# Altium PCB DBL TLC5940 driver for High load.PcbDoc
Units mm, origin at the board's own origin, x right, y up, seen from the top; angles counter-clockwise.
Board outline 152.4 x 101.6 mm, 2 copper layers (Top Layer, Bottom Layer); 66 components, 76 nets, 448 pads, 19 vias.
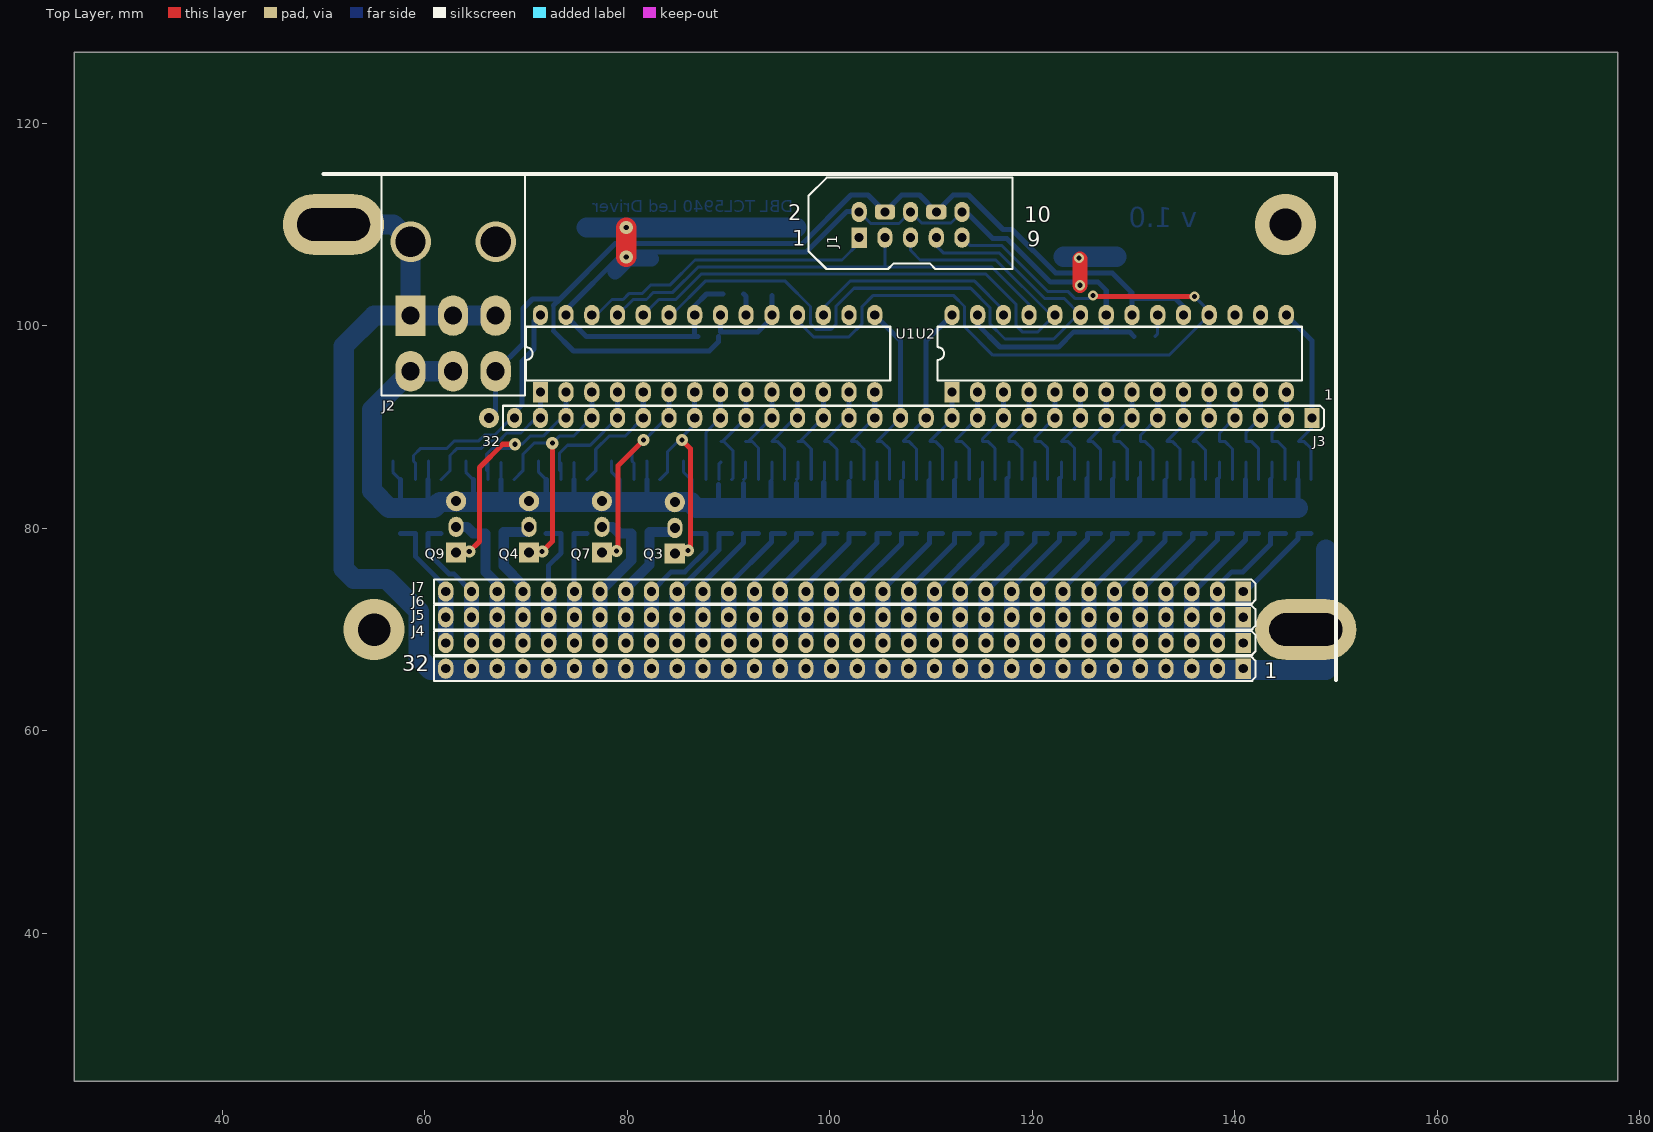
[diagram p0: Top Layer view]
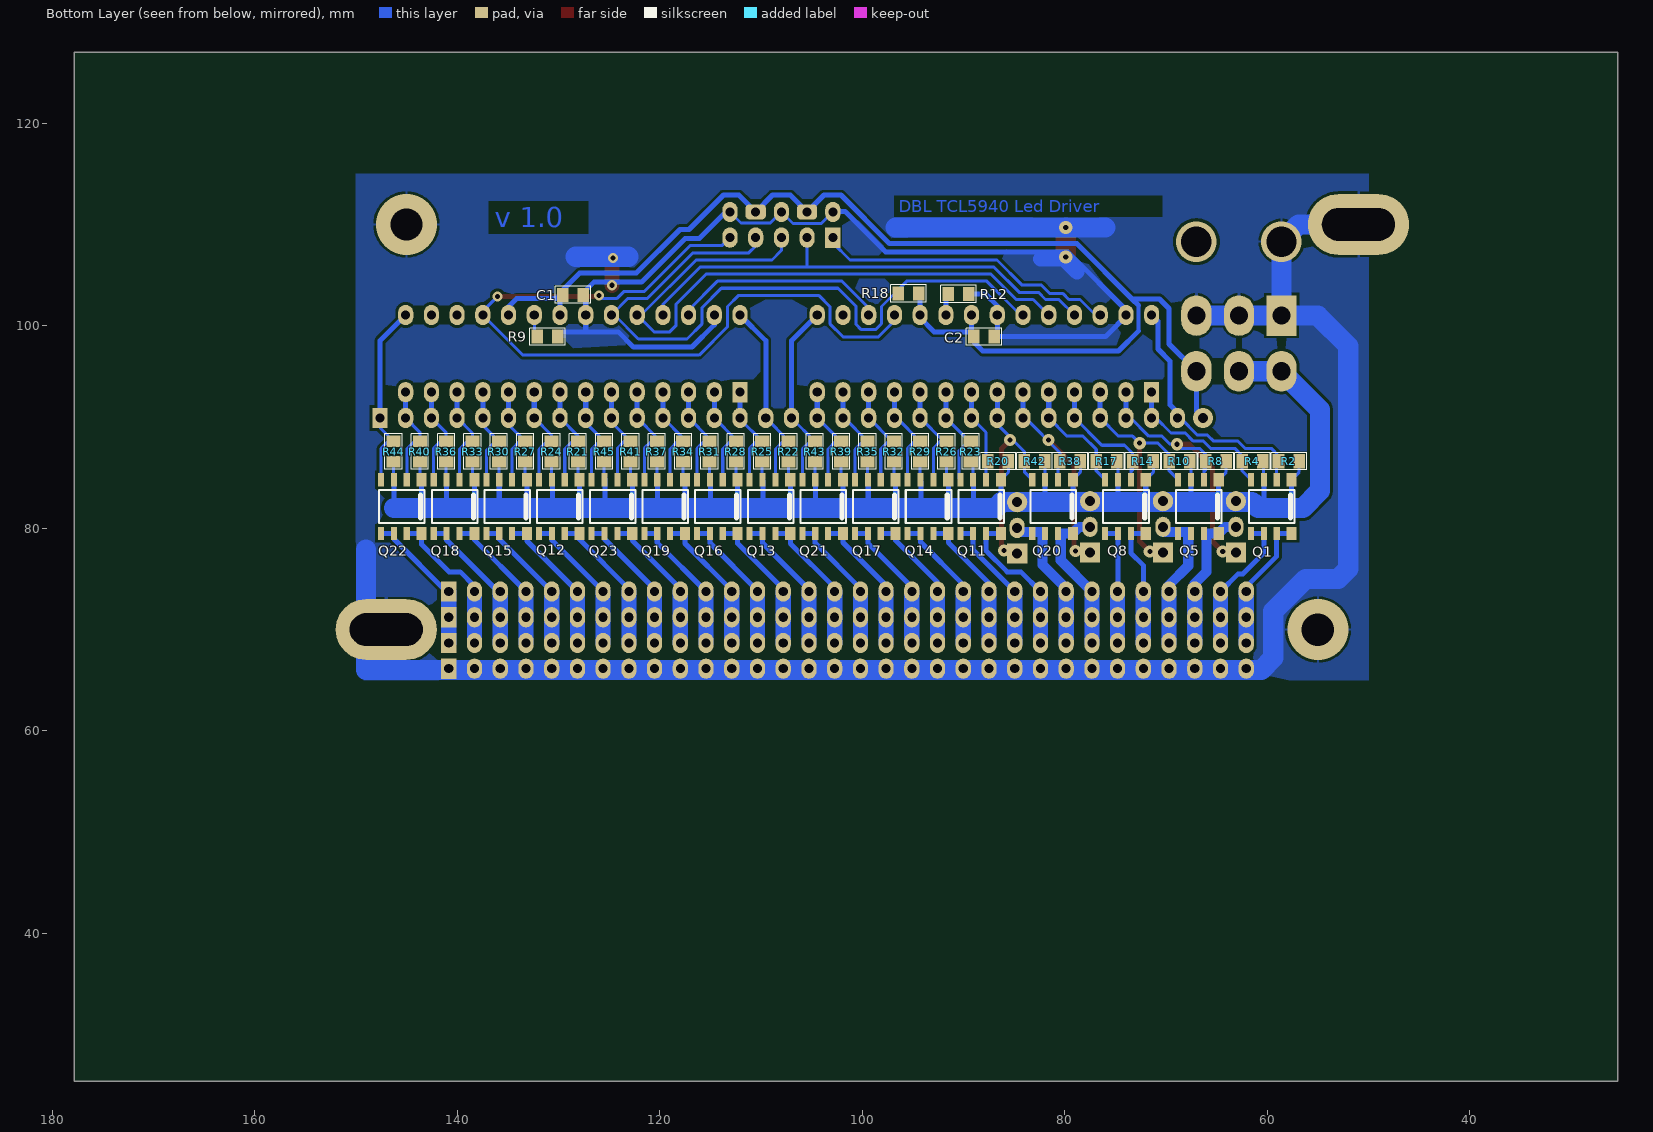
[diagram p1: Bottom Layer view, seen from below]
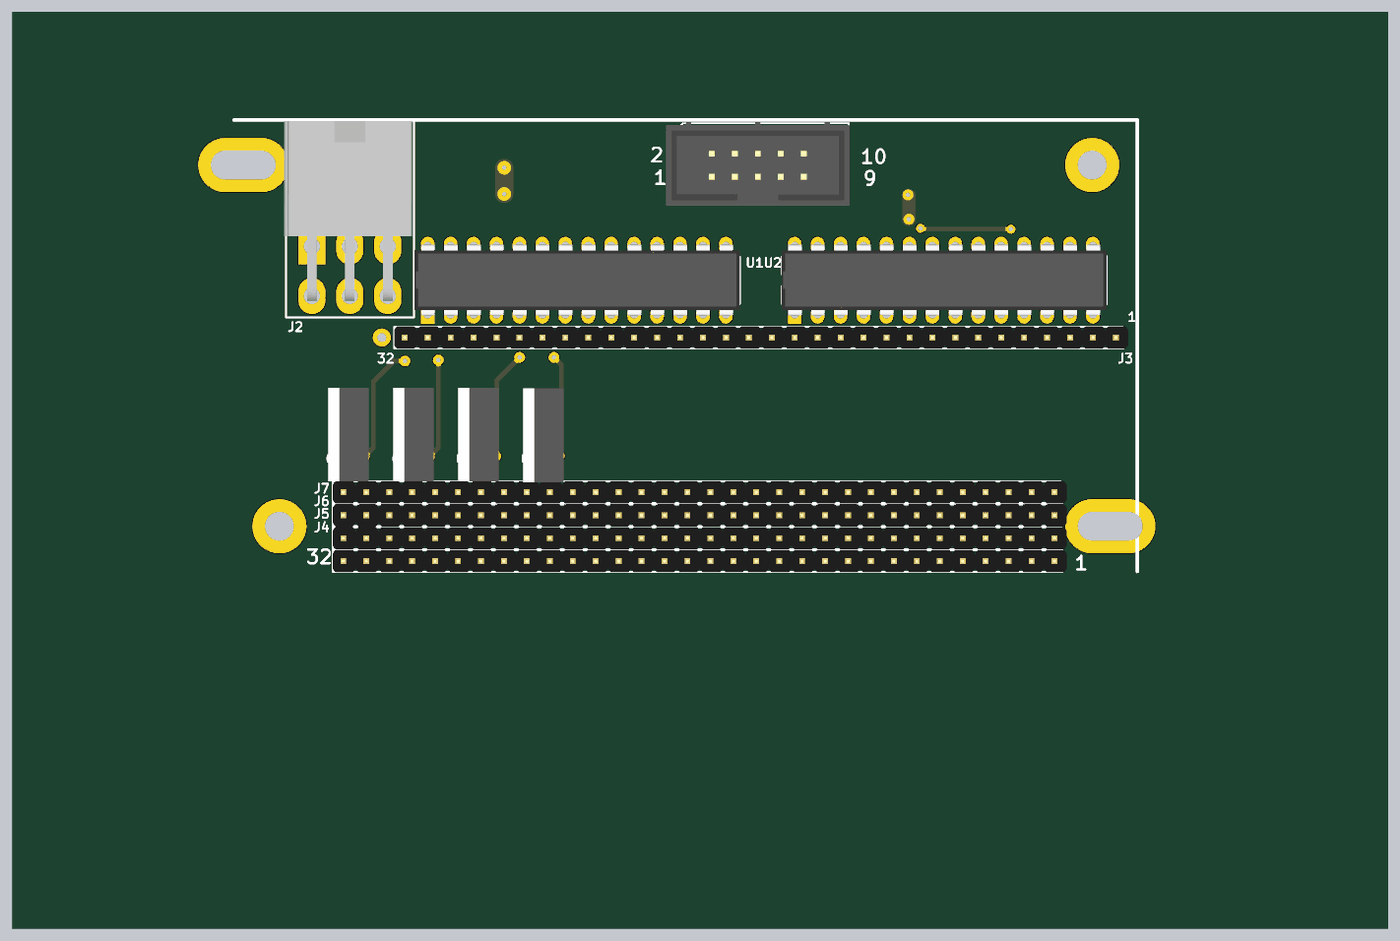
[diagram p2: 3D render of the assembled board from above, using the file's embedded part models]
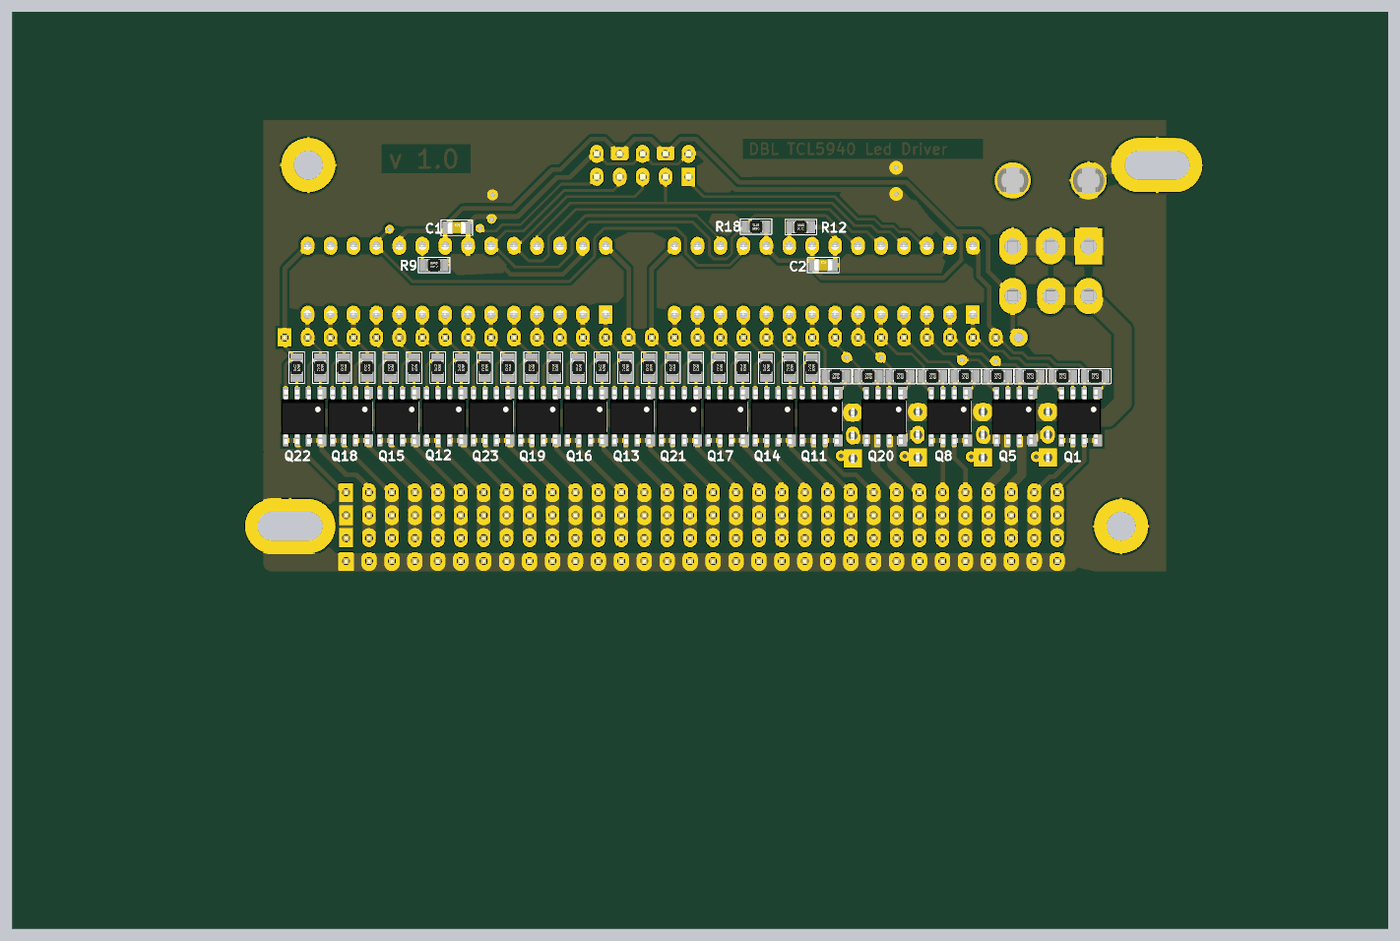
[diagram p3: 3D render of the assembled board from below, using the file's embedded part models]

## Layer stack, top to bottom
Top Solder: solder mask 0.0102, Solder Resist, Dk 3.5
Top Layer: signal copper 0.0356
Dielectric 1: dielectric 0.32, FR-4, Dk 4.8
Bottom Layer: signal copper 0.0356
Bottom Solder: solder mask 0.0102, Solder Resist, Dk 3.5

## Board outline
25.4,25.4 177.8,25.4 177.8,127 25.4,127

## Design rules (kind name [scope] priority, off if disabled: settings)
Clearance Clearance_1 [InComponent('J1')] p1: gap=0.2
Clearance [All] p2: gap=0.3
ComponentClearance ComponentClearance_1 [(HasFootprint('SMD 0603 (1608)')) vs (HasFootprint('SMD 0603 (1608)'))] p1: gap=0.01 collisioncheckmode=3 verticalgap=0.254 showdistances=FALSE
ComponentClearance [All] p2: gap=0.01 collisioncheckmode=3 verticalgap=0.001 showdistances=FALSE
PolygonConnect [All] p1: connectstyle=Relief reliefconductorwidth=0.254 reliefentries=4 polygonreliefangle="90 Angle" airgapwidth=0.254
RoutingVias [All] p1: holewidth=0.711 width=1.27 viastyle="Through Hole" minholewidth=0.711 minwidth=1.27 maxholewidth=0.711 maxwidth=1.27
SolderMaskExpansion [All] p1: expansion=0.102
Width Width_1 [InNet('GND')] p1: maxlimit=3 minlimit=0.2 preferedwidth=0.5
Width [All] p2: maxlimit=3 minlimit=0.3 preferedwidth=0.3
28 further rules are at their usual default settings.

## Classes and differential pairs
component class "DBL TLC5940 driver for High load": C1 C2 J1 J2 J3 J4 J5 J6 J7 Q3 Q4 Q7 Q9 R9 R12 R18 U1 U2
component class "DBL TLC5940 driver for High load - 5.3A MOSFET": Q1 Q5 Q8 Q11 Q12 Q13 Q14 Q15 Q16 Q17 Q18 Q19 Q20 Q21 Q22 Q23 R2 R4 R8 R10 R14 R17 R20 R21 R22 R23 R24 R25 R26 R27 R28 R29 R30 R31 R32 R33 R34 R35 R36 R37 R38 R39 R40 R41 R42 R43 R44 R45

## Components (designator, comment, footprint, x,y, rotation, side; value= is the part's Value field where it differs from the comment)
C1 "0.1uF" "SMD 0805 (2012)" 129.591,103.025 r180 bottom
C2 "0.1uF" "SMD 0805 (2012)" 89,98.9 r180 bottom
J1 "Connector" "LINE 2.54 x 10D (2 x 5) - BH" 102.9,108.7 r90 top
J2 "connector" "Molex Mini-Fit Jr - 6Pin R" 67,101 r270 top
J3 "Test Connector" "LINE 2.54 x 32" 147.62,90.9 r270 top
J4 "PowerOut" "LINE 2.54 x 32" 140.82,66.14 r270 top (schematic designator J2)
J5 "PowerOut" "LINE 2.54 x 32" 140.82,68.68 r270 top (schematic designator J2)
J6 "PowerOut" "LINE 2.54 x 32" 140.82,71.22 r270 top (schematic designator J2)
J7 "PowerOut" "LINE 2.54 x 32" 140.82,73.76 r270 top (schematic designator J2)
Q1 "IRF7314" SO8 57.8,84.8 r270 bottom
Q3 "IRF4905" TO220-2 84.7,77.5 r0 top
Q4 "IRF4905" TO220-2 70.3,77.6 r0 top
Q5 "IRF7314" SO8 65,84.8 r270 bottom
Q7 "IRF4905" TO220-2 77.5,77.6 r0 top
Q8 "IRF7314" SO8 72.2,84.8 r270 bottom
Q9 "IRF4905" TO220-2 63.1,77.6 r0 top
Q11 "IRF7314" SO8 86.5,84.8 r270 bottom
Q12 "IRF7314" SO8 128.1,84.8 r270 bottom
Q13 "IRF7314" SO8 107.3,84.8 r270 bottom
Q14 "IRF7314" SO8 91.7,84.8 r270 bottom
Q15 "IRF7314" SO8 133.3,84.8 r270 bottom
Q16 "IRF7314" SO8 112.5,84.8 r270 bottom
Q17 "IRF7314" SO8 96.9,84.8 r270 bottom
Q18 "IRF7314" SO8 138.5,84.8 r270 bottom
Q19 "IRF7314" SO8 117.7,84.8 r270 bottom
Q20 "IRF7314" SO8 79.4,84.8 r270 bottom
Q21 "IRF7314" SO8 102.1,84.8 r270 bottom
Q22 "IRF7314" SO8 143.7,84.8 r270 bottom
Q23 "IRF7314" SO8 122.9,84.8 r270 bottom
R2 "10 kOm" "SMD 0805 (2012)" 58.9,86.6 r180 bottom
R4 "10 kOm" "SMD 0805 (2012)" 62.5,86.6 r180 bottom
R8 "10 kOm" "SMD 0805 (2012)" 66.1,86.6 r180 bottom
R9 "560 kOm" "SMD 0805 (2012)" 132.1,98.9 r180 bottom
R10 "10 kOm" "SMD 0805 (2012)" 69.7,86.6 r180 bottom
R12 "560 kOm" "SMD 0805 (2012)" 91.5,103.1 r180 bottom
R14 "10 kOm" "SMD 0805 (2012)" 73.3,86.6 r180 bottom
R17 "10 kOm" "SMD 0805 (2012)" 76.9,86.6 r180 bottom
R18 "20kOm" "SMD 0805 (2012)" 94.4,103.2 r0 bottom
R20 "10 kOm" "SMD 0805 (2012)" 87.6,86.6 r180 bottom
R21 "10 kOm" "SMD 0805 (2012)" 128.1,88.6 r270 bottom
R22 "10 kOm" "SMD 0805 (2012)" 107.3,88.6 r270 bottom
R23 "10 kOm" "SMD 0805 (2012)" 89.3,88.6 r270 bottom
R24 "10 kOm" "SMD 0805 (2012)" 130.7,88.6 r270 bottom
R25 "10 kOm" "SMD 0805 (2012)" 109.9,88.6 r270 bottom
R26 "10 kOm" "SMD 0805 (2012)" 91.7,88.6 r270 bottom
R27 "10 kOm" "SMD 0805 (2012)" 133.3,88.6 r270 bottom
R28 "10 kOm" "SMD 0805 (2012)" 112.5,88.6 r270 bottom
R29 "10 kOm" "SMD 0805 (2012)" 94.3,88.6 r270 bottom
R30 "10 kOm" "SMD 0805 (2012)" 135.9,88.6 r270 bottom
R31 "10 kOm" "SMD 0805 (2012)" 115.1,88.6 r270 bottom
R32 "10 kOm" "SMD 0805 (2012)" 96.9,88.6 r270 bottom
R33 "10 kOm" "SMD 0805 (2012)" 138.5,88.6 r270 bottom
R34 "10 kOm" "SMD 0805 (2012)" 117.7,88.6 r270 bottom
R35 "10 kOm" "SMD 0805 (2012)" 99.5,88.6 r270 bottom
R36 "10 kOm" "SMD 0805 (2012)" 141.1,88.6 r270 bottom
R37 "10 kOm" "SMD 0805 (2012)" 120.3,88.6 r270 bottom
R38 "10 kOm" "SMD 0805 (2012)" 80.5,86.6 r180 bottom
R39 "10 kOm" "SMD 0805 (2012)" 102.1,88.6 r270 bottom
R40 "10 kOm" "SMD 0805 (2012)" 143.7,88.6 r270 bottom
R41 "10 kOm" "SMD 0805 (2012)" 122.9,88.6 r270 bottom
R42 "10 kOm" "SMD 0805 (2012)" 84,86.6 r180 bottom
R43 "10 kOm" "SMD 0805 (2012)" 104.7,88.6 r270 bottom
R44 "10 kOm" "SMD 0805 (2012)" 146.3,88.6 r270 bottom
R45 "10 kOm" "SMD 0805 (2012)" 125.5,88.6 r270 bottom
U1 "PWM Led Driver" "DIP-28 (OVAL)" 71.42,93.44 r0 top
U2 "PWM Led Driver" "DIP-28 (OVAL)" 112.06,93.44 r0 top

## Footprints (in the part's own frame and the unit in brackets; to place one, negate y for a bottom-side part, rotate by r counter-clockwise, add the part's x,y. Pads: shape width x height; smd on the part's side, far side on the other; paste and mask are expansions set on the pad)
"DIP-28 (OVAL)" [mm] "DIP; 28 Leads; Row Spacing 7.62 mm; Pitch 2.54 mm"
  rect 1.5x2 hole 0.9: 1(0,0)
  oval 1.5x2 hole 0.9: 2(2.54,0) 3(5.08,0) 4(7.62,0) 5(10.16,0) 6(12.7,0) 7(15.24,0) 8(17.78,0) 9(20.32,0) 10(22.86,0) 11(25.4,0) 12(27.94,0) 13(30.48,0) 14(33.02,0) 15(33.02,7.62) 16(30.48,7.62) 17(27.94,7.62) 18(25.4,7.62) 19(22.86,7.62) 20(20.32,7.62) 21(17.78,7.62) 22(15.24,7.62) 23(12.7,7.62) 24(10.16,7.62) 25(7.62,7.62) 26(5.08,7.62) 27(2.54,7.62) 28(0,7.62)
  silkscreen extent -1.41,1.16 34.55,6.46, body extent -1.45,-0.11 34.55,7.76, height 5.08
"LINE 2.54 x 10D (2 x 5) - BH" [mm]
  rect 2x1.5 hole 0.9: 1(0,0)
  oval 2x1.5 hole 0.9: 2(2.54,0) 3(0,-2.54) 5(0,-5.08) 6(2.54,-5.08) 7(0,-7.62) 9(0,-10.16) 10(2.54,-10.16)
  rrect50% 1.5x2 hole 0.9: 4(2.54,-2.54) 8(2.54,-7.62)
  silkscreen extent -3.1,-15.15 5.92,5, body extent -3.18,-15.25 6.03,5.1, height 8.84
"LINE 2.54 x 32" [mm]
  rect 2x1.5 hole 0.9: 1(0,0)
  oval 2x1.5 hole 0.9: 2(0,-2.54) 3(0,-5.08) 4(0,-7.62) 5(0,-10.16) 6(0,-12.7) 7(0,-15.24) 8(0,-17.78) 9(0,-20.32) 10(0,-22.86) 11(0,-25.4) 12(0,-27.94) 13(0,-30.48) 14(0,-33.02) 15(0,-35.56) 16(0,-38.1) 17(0,-40.64) 18(0,-43.18) 19(0,-45.72) 20(0,-48.26) 21(0,-50.8) 22(0,-53.34) 23(0,-55.88) 24(0,-58.42) 25(0,-60.96) 26(0,-63.5) 27(0,-66.04) 28(0,-68.58) 29(0,-71.12) 30(0,-73.66) 31(0,-76.2) 32(0,-78.74)
  silkscreen extent -1.2,-79.9 1.2,1.2, body extent -1.25,-79.91 1.25,1.38, height 8.2
"Molex Mini-Fit Jr - 6Pin R" [mm] "Molex Mega-Fit"
  rect 4x3 hole 1.8: 1(0,-8.4)
  oval 4x3 hole 1.8: 2(0,-4.2) 3(0,0) 4(5.5,-8.4) 5(5.5,-4.2) 6(5.5,0)
  silkscreen extent -13.9,-11.27 7.88,2.9, body extent -13.89,-11.5 6.04,2.7, height 11.4
"SMD 0805 (2012)" [mil]
  rect 45x55 smd: 1(0.35,0.98) 2(80.35,0.98)
  silkscreen extent -29,-32 109,34, body extent 1,-24 80,26, height 31
SO8 [mm]
  rect 1.3x1 smd: 1(0,0.2) 8(5.3,0.2)
  rect 1.3x0.6 smd: 2(0,-1.27) 3(0,-2.54) 4(0,-3.81) 5(5.3,-3.81) 6(5.3,-2.54) 7(5.3,-1.27)
  silkscreen extent 1,-4 4.3,0.5, body extent -0.32,-4.33 5.67,0.57, height 1.6
TO220-2 [mm]
  rect 2x2 hole 1: 1(0,0)
  oval 1.5x2 hole 1: 2(0,2.54)
  round 2 hole 1: 3(0,5.08)
  body extent -2.7,-2.65 1.8,7.75, height 19

## Part data
C1 C2: library part "Cap SMD 0402-1812", "Capacitor"
J1: library part "PLD-10 (2 x 5)", "Vert, Dbl line, Male"
J2: library part "Molex Mini-Fit Jr - 6 pin", "Right, Dbl line, Female"
J3 J4 J5 J6 J7: library part PLS-32, "Vert, Sgl line, Male"
Q1 Q5 Q8 Q11 Q12 Q13 Q14 Q15 Q16 Q17 Q18 Q19 Q20 Q21 Q22 Q23: "Dual P-Ch  20V - 0.058? - 5.3A"
Q3 Q4 Q7 Q9: "P-Channel 55V - 0.02? - 74A"
R2 R4 R8 R9 R10 R12 R14 R17 R18 R20 R21 R22 R23 R24 R25 R26 R27 R28 R29 R30 R31 R32 R33 R34 R35 R36 R37 R38 R39 R40 R41 R42 R43 R44 R45: library part "Res All Types"
U1 U2: library part TLC5940, "16-Channel LED Driver With DOT Correction and Grayscale PWM Control"

## Free pads (board coordinates)
  oval 10x6 hole 3.2 slot 7.2 at 0 deg: 0(51,110) 0(147,70)

## Via types
v1: diameter 1.2, hole 0.5, Top Layer to Bottom Layer, 8 vias
v2: diameter 1, hole 0.5, Top Layer to Bottom Layer, 4 vias
v3: diameter 1.3, hole 0.5, Top Layer to Bottom Layer, 2 vias
v4: diameter 6, hole 3.2, Top Layer to Bottom Layer, 2 vias
v5: diameter 4, hole 3, Top Layer to Bottom Layer, 2 vias
v6: diameter 2, hole 1, Top Layer to Bottom Layer, 1 vias

## Nets (pads, with @x,y where several pads share a name; then routed paths per layer and width w, separated by ;. In a path a pad name is that pad's centre, name@x,y a point inside that pad or via, vN(x,y) a via of type N, cw(c..) or ccw(c..) an arc to the next point about the centre after c; other vN are vias at no path point)
+5V: C1.1 C2.1 J1.4 J1.8 J2.6 R18.1 U1.19 U1.21 U2.19 U2.21 | length 124.1
  Bottom Layer w0.3: U1.21 U1.21@89.2,101.3
  Bottom Layer w0.4: 72.7,99.5 72.7,102
  Bottom Layer w0.5: v6(66.34,90.9) 67,91.56 J2.6 69.7,98.2 69.7,101.7 70.65,102.65 73.35,102.65 ; 72.7,99.5 74.7,97.5 88.1,97.5 88.991,98.391 C2.1 ; 72.7,102 73.35,102.65 ; U1.21 89.2,99.4 92.9,99.4 94.28,100.78 U1.19 R18.1@94.28,103 ; U1.21@89.2,101.3 U1.21@89.5,101.3 ; C1.1@129.591,103.025 C1.1@129.84,103.025 ; U2.21 C1.1@129.84,103.025 ; U2.19 134.92,101.88 134.1,102.7 130.165,102.7 C1.1@129.84,103.025 ; 73.35,102.65 78.8,108.1 97.3,108.1 102.1,112.9 103.78,112.9 J1.4 107.1,112.9 108.86,112.9 J1.8 112.18,112.9 113.7,112.9 117.1,109.5 118,109.5 122.3,105.2 127.9,105.2 129.84,103.26 C1.1@129.84,103.025
+12V: J2.4 J2.5 Q1.1 Q1.3 Q3.3 Q4.3 Q5.1 Q5.3 Q7.3 Q8.1 Q8.3 Q9.3 Q11.1 Q11.3 Q12.1 Q12.3 Q13.1 Q13.3 Q14.1 Q14.3 Q15.1 Q15.3 Q16.1 Q16.3 Q17.1 Q17.3 Q18.1 Q18.3 Q19.1 Q19.3 Q20.1 Q20.3 Q21.1 Q21.3 Q22.1 Q22.3 Q23.1 Q23.3 R2.2 R4.2 R8.2 R10.2 R14.2 R17.2 R20.2 R21.2 R22.2 R23.2 R24.2 R25.2 R26.2 R27.2 R28.2 R29.2 R30.2 R31.2 R32.2 R33.2 R34.2 R35.2 R36.2 R37.2 R38.2 R39.2 R40.2 R41.2 R42.2 R43.2 R44.2 R45.2 | length 251.1
  Bottom Layer w0.3: R2.2 56.859,85.541 Q1.1 ; Q1.3@60.359,84.859 R4.2@60.359,86.625 ; R8.2 64.059,85.541 Q5.1 ; Q5.3 R10.2@67.54,86.506 ; R14.2 71.259,85.541 Q8.1 ; Q8.3 R17.2@74.74,86.506 ; R38.2 78.459,85.541 Q20.1 ; Q20.3 81.94,86.606 R42.2 ; R20.2 85.559,85.541 Q11.1 ; Q11.3 89.04,86.324 R23.2 ; Q14.1 91.675,84.975 R26.2 ; Q14.3 94.275,84.835 R29.2 ; Q17.1 96.875,84.975 R32.2 ; Q17.3@99.475,84.835 R35.2 ; Q21.1@102.075,84.975 R39.2 ; Q21.3@104.675,84.835 R43.2 ; Q13.1@107.275,84.975 R22.2 ; Q13.3 109.875,84.835 R25.2 ; Q16.1@112.475,84.975 R28.2 ; Q16.3@115.075,84.835 R31.2 ; Q19.1@117.675,84.975 R34.2 ; Q19.3@120.275,84.835 R37.2 ; Q23.1@122.875,84.975 R41.2 ; Q23.3@125.475,84.835 R45.2 ; Q12.1@128.075,84.975 R21.2 ; Q12.3@130.675,84.835 R24.2 ; Q15.1@133.275,84.975 R27.2 ; Q15.3@135.875,84.835 R30.2 ; Q18.1@138.475,84.975 R33.2 ; Q18.3@141.075,84.835 R36.2 ; Q22.1@143.675,84.975 R40.2 ; Q22.3@146.275,84.835 R44.2
  Bottom Layer w0.5: 57.6,82 Q1.1 ; 60.34,82.14 Q1.3 ; 64.8,82.6 Q5.1 ; 67.54,82.6 Q5.3 ; 72,82.3 Q8.1 ; 74.74,82.6 Q8.3 ; 79.2,82.6 Q20.1 ; 81.94,82.6 Q20.3 ; 86.3,82.6 Q11.1 ; 89,81.54 Q11.3@89,84.3 ; 91.5,81.64 Q14.1@91.5,84.4 ; 94.2,81.84 Q14.3@94.2,84.6 ; 96.7,81.64 Q17.1@96.7,84.4 ; 99.4,81.74 Q17.3@99.4,84.5 ; 101.9,81.84 Q21.1@101.9,84.6 ; 104.6,81.84 Q21.3@104.6,84.6 ; 107.1,81.84 Q13.1@107.1,84.6 ; 109.8,81.94 Q13.3@109.8,84.7 ; 112.3,81.94 Q16.1@112.3,84.7 ; 115,82.04 Q16.3@115,84.8 ; 117.5,82.14 Q19.1@117.5,84.9 ; 120.2,82.14 Q19.3@120.2,84.9 ; 122.7,82.14 Q23.1@122.7,84.9 ; 125.4,82.14 Q23.3@125.4,84.9 ; 127.9,82.04 Q12.1 ; 130.6,82.14 Q12.3@130.6,84.9 ; 133.1,81.94 Q15.1@133.1,84.7 ; 135.84,82.14 Q15.3 ; 138.3,82.1 Q18.1 ; 141.04,82.16 Q18.3 ; 143.5,82 Q22.1 ; 146.24,82.04 Q22.3
  Bottom Layer w2: J2.5 J2.4 54.8,91.7 54.8,83.7 56.5,82 60.9,82 61.5,82.6 64.8,82.6 67.54,82.6 74.74,82.6 79.2,82.6 81.94,82.6 86.3,82.6 ; 86.3,82.5 86.8,82 143.5,82 146.24,82
BLANK: J1.7 R18.2 U1.23 U2.23 | length 69.6
  Bottom Layer w0.3: U1.23 84.36,101.06 87.7,104.4 95.6,104.4 98.1,101.9 98.1,100.2 98.69,99.61 100.09,99.61 100.6,100.12 100.6,101.9 102.4,103.7 113.907,103.7 115.8,101.807 115.8,100.2 117.3,98.7 122.1,98.7 124.46,101.06 U2.23 123.12,102.7 121.2,102.7 116.7,107.2 111.2,107.2 110.52,107.88 J1.7
GND: C1.2 C2.2 J1.2 J1.6 J1.10 J2.1 J2.2 J2.3 J4.1 J4.2 J4.3 J4.4 J4.5 J4.6 J4.7 J4.8 J4.9 J4.10 J4.11 J4.12 J4.13 J4.14 J4.15 J4.16 J4.17 J4.18 J4.19 J4.20 J4.21 J4.22 J4.23 J4.24 J4.25 J4.26 J4.27 J4.28 J4.29 J4.30 J4.31 J4.32 pad.0 R9.2 R12.2 U1.22 U1.27 U2.22 U2.27 | length 310.9
  Top Layer w1.5: v2(124.7,104) v2@124.7,106.6
  Top Layer w2: v3(79.9,106.8) v3(79.9,109.7)
  Bottom Layer w0.3: J1.2 104.04,110.1 106.84,110.1 J1.6 109.08,110.14 111.96,110.14 J1.10@113.26,111.44
  Bottom Layer w0.5: U1.22@86.55,100.95 U1.22 ; C2.2@86.66,99.224 U1.22 ; C2.2 75.975,98.925 73.65,101.25 79.7,107.3 97.7,107.3 101.7,111.3 J1.2@102.9,111.3 ; R12.2 87.825,103.125 86.66,101.96 U1.22 ; J1.10@113.26,111.44 116.08,108.62 117.48,108.62 121.8,104.3 126.5,104.3 127.3,103.5 U2.22 127.3,99.4 ; U2.27 114.6,100.1 116.8,97.9 122.6,97.9 124.1,99.4 129.584,99.4 R9.2
  Bottom Layer w1.5: 78.8,105.3 80.1,106.6 82.4,106.6
  Bottom Layer w2: pad.0@51,110 56.9,110 v5(58.6,108.3) J2.1 ; J2.3 J2.2 J2.1 ; 76,109.7 96.7,109.7 ; 123.1,106.8 128.3,106.8 ; 149,77.9 149,66 60.6,66 59.4,67.2 59.4,71.8 56.2,75 53,75 52,76 52,98 55,101 J2.1
  other v2: 124.6,106.7
  other v4: 55,70 145,110
GSCLK: J1.9 U1.18 U2.18 | length 78.1
  Top Layer w0.5: v2(126,103) 126.1,102.9 v2(136,102.9)
  Bottom Layer w0.3: U1.18 96.82,100.48 98.4,98.9 101.9,98.9 103.2,100.2 103.2,101.9 104.3,103 112.2,103 113.3,101.9 113.3,99.9 116.1,97.1 133.5,97.1 U2.18 137.46,101.44 v2(136,102.9) ; J1.9 113.86,107.9 117,107.9 121.5,103.4 123.5,103.4 124.2,102.7 125.7,102.7 v2(126,103)
  Bottom Layer w0.5: J1.9 J1.9@113.26,108.5
NetR9_1: R9.1 U2.20 | length 2.6
  Bottom Layer w0.3: R9.1 132.38,99.214 U2.20 U2.20@132.609,100.831
NetR12_1: R12.1 U1.20 | length 2.2
  Bottom Layer w0.5: R12.1 91.74,102.876 U1.20
"OUTL 1": J3.32 Q1.2 R2.1 U1.28 | length 25.2
  Bottom Layer w0.3: Q1.2 59.07,86.446 R2.1 58.891,87.191 59.6,87.9 62.2,87.9 62.9,88.6 65.3,88.6 65.9,89.2 66.9,89.2 68.6,90.9 J3.32
  Bottom Layer w0.5: J3.32 68.88,91.48 69.6,92.2 69.6,96.5 70.8,97.7 70.8,100.44 U1.28
"OUTL 2": J3.31 Q1.4 R4.1 U1.1 | length 15.8
  Bottom Layer w0.3: Q1.4 62.491,85.681 62.491,87.191 63.2,87.9 65.6,87.9 66.3,88.6 67.3,88.6 68.1,89.4 69.5,89.4 71,90.9 J3.31
  Bottom Layer w0.5: J3.31 U1.1
"OUTL 3": J3.30 Q5.2 Q9.1 R8.1 U1.2 | length 28.3
  Top Layer w0.5: v1(64.4,77.7) 65.4,78.7 65.4,86 67.7,88.3 v1(68.9,88.3)
  Bottom Layer w0.3: 66.091,85.725 R8.1 66.091,87.291 66.7,87.9 68.5,87.9 v1(68.9,88.3) 69.6,88.3 70.4,89.1 71.7,89.1 73.5,90.9 J3.30 ; Q5.2 R8.1@66.27,86.446
  Bottom Layer w0.5: J3.30 U1.2
"OUTL 4": J3.29 Q4.1 Q5.4 R10.1 U1.3 | length 24.8
  Top Layer w0.5: v1(71.6,77.7) 72.6,78.7 v1(72.6,88.4)
  Bottom Layer w0.3: Q5.4 69.691,85.681 69.691,87.291 70.8,88.4 v1(72.6,88.4) 73.3,89.1 74.7,89.1 J3.29
  Bottom Layer w0.5: J3.29 U1.3
"OUTL 5": J3.28 Q8.2 R14.1 U1.4 | length 13.1
  Bottom Layer w0.3: 73.291,85.725 73.291,87.391 74.1,88.2 76.34,88.2 J3.28 ; Q8.2 R14.1@73.47,86.446
  Bottom Layer w0.5: J3.28 U1.4
"OUTL 6": J3.27 Q8.4 R17.1 U1.5 | length 11.9
  Bottom Layer w0.3: Q8.4 76.891,85.681 R17.1 76.891,87.791 78.2,89.1 79.78,89.1 J3.27
  Bottom Layer w0.5: J3.27 U1.5
"OUTL 7": J3.26 Q7.1 Q20.2 R38.1 U1.6 | length 22.4
  Top Layer w0.5: v1(78.95,77.75) 79.1,77.9 79.1,86.2 v1(81.6,88.7)
  Bottom Layer w0.3: Q20.2 80.67,86.446 R38.1 80.491,87.491 83.9,90.9 J3.26
  Bottom Layer w0.5: J3.26 U1.6
"OUTL 8": J3.25 Q3.1 Q20.4 R42.1 U1.7 | length 21.4
  Top Layer w0.5: v1(85.4,88.7) 86.25,87.85 86.25,78.05 v1(86,77.8)
  Bottom Layer w0.3: Q20.4 83.991,85.581 R42.1 83.991,87.591 86.66,90.26 J3.25
  Bottom Layer w0.5: J3.25 U1.7
"OUTL 9": J3.24 Q11.2 R20.1 U1.8 | length 9.2
  Bottom Layer w0.3: Q11.2 87.77,89.47 J3.24
  Bottom Layer w0.5: J3.24 U1.8
"OUTL 10": J3.23 Q11.4 R23.1 U1.9 | length 10.3
  Bottom Layer w0.3: R23.1 R23.1@89.431,88.591 ; Q11.4 90.423,84.914 90.423,87.676 89.509,88.591 R23.1@89.431,88.591 ; J3.23 R23.1@89.431,88.591
  Bottom Layer w0.5: J3.23 U1.9
"OUTL 11": J3.22 Q14.2 R26.1 U1.10 | length 10.5
  Bottom Layer w0.3: R26.1 R26.1@91.971,88.591 ; Q14.2 92.97,87.93 92.309,88.591 R26.1@91.971,88.591 ; J3.22 R26.1@91.971,88.591
  Bottom Layer w0.5: J3.22 U1.10
"OUTL 12": J3.21 Q14.4 R29.1 U1.11 | length 10.6
  Bottom Layer w0.3: R29.1 R29.1@94.291,88.591 ; Q14.4 95.51,87.89 94.809,88.591 R29.1@94.291,88.591 ; J3.21 96.6,90.9 R29.1@94.291,88.591
  Bottom Layer w0.5: J3.21 U1.11
"OUTL 13": J3.20 Q17.2 R32.1 U1.12 | length 10.4
  Bottom Layer w0.3: R32.1 R32.1@97.051,88.591 ; Q17.2 98.17,87.83 97.409,88.591 R32.1@97.051,88.591 ; J3.20 R32.1@97.051,88.591
  Bottom Layer w0.5: J3.20 U1.12
"OUTL 14": J3.19 Q17.4 R35.1 U1.13 | length 10.5
  Bottom Layer w0.3: Q17.4 100.71,87.79 99.909,88.591 R35.1 101.784,90.9 J3.19
  Bottom Layer w0.5: J3.19 U1.13
"OUTL 15": J3.18 Q21.2 R39.1 U1.14 | length 10.4
  Bottom Layer w0.3: Q21.2 103.37,87.83 102.609,88.591 102.131,88.591 J3.18
  Bottom Layer w0.5: J3.18 U1.14
"OUTL 16": J3.17 Q21.4 R43.1 U1.15 | length 19
  Bottom Layer w0.3: Q21.4 105.91,87.79 105.109,88.591 R43.1 106.98,90.896 J3.17
  Bottom Layer w0.5: U1.15 106.98,98.52 J3.17
"OUTL 17": J3.16 Q13.2 R22.1 U2.28 | length 19.1
  Bottom Layer w0.3: Q13.2 108.57,87.83 107.809,88.591 R22.1 107.275,88.655 J3.16
  Bottom Layer w0.5: J3.16 109.52,98.52 U2.28
"OUTL 18": J3.15 Q13.4 R25.1 U2.1 | length 10.4
  Bottom Layer w0.3: Q13.4 111.11,87.89 110.409,88.591 R25.1 112.06,90.776 J3.15
  Bottom Layer w0.5: J3.15 U2.1
"OUTL 19": J3.14 Q16.2 R28.1 U2.2 | length 10.4
  Bottom Layer w0.3: Q16.2 113.77,87.83 113.009,88.591 R28.1 112.475,88.775 J3.14
  Bottom Layer w0.5: J3.14 U2.2
"OUTL 20": J3.13 Q16.4 R31.1 U2.3 | length 10.3
  Bottom Layer w0.3: Q16.4 116.31,87.89 115.609,88.591 R31.1 115.075,88.835 J3.13
  Bottom Layer w0.5: J3.13 U2.3
"OUTL 21": J3.12 Q19.2 R34.1 U2.4 | length 10.3
  Bottom Layer w0.3: Q19.2 118.97,87.83 118.209,88.591 R34.1 117.675,88.895 J3.12
  Bottom Layer w0.5: J3.12 U2.4
"OUTL 22": J3.11 Q19.4 R37.1 U2.5 | length 10.3
  Bottom Layer w0.3: Q19.4 121.51,87.89 120.809,88.591 R37.1 120.275,88.955 J3.11
  Bottom Layer w0.5: J3.11 U2.5
"OUTL 23": J3.10 Q23.2 R41.1 U2.6 | length 10.3
  Bottom Layer w0.3: Q23.2 124.17,87.93 123.509,88.591 R41.1 124.76,90.476 J3.10
  Bottom Layer w0.5: J3.10 U2.6
"OUTL 24": J3.9 Q23.4 R45.1 U2.7 | length 10.2
  Bottom Layer w0.3: Q23.4 126.71,87.79 125.909,88.591 R45.1 127.3,90.416 J3.9
  Bottom Layer w0.5: J3.9 U2.7
"OUTL 25": J3.8 Q12.2 R21.1 U2.8 | length 10.2
  Bottom Layer w0.3: Q12.2 129.37,87.83 128.609,88.591 R21.1 128.075,89.135 J3.8
  Bottom Layer w0.5: J3.8 U2.8
"OUTL 26": J3.7 Q12.4 R24.1 U2.9 | length 10.1
  Bottom Layer w0.3: Q12.4 131.91,87.79 131.109,88.591 R24.1 130.675,89.195 J3.7
  Bottom Layer w0.5: J3.7 U2.9
"OUTL 27": J3.6 Q15.2 R27.1 U2.10 | length 10.2
  Bottom Layer w0.3: Q15.2 134.57,87.83 133.809,88.591 R27.1 134.92,90.236 J3.6
  Bottom Layer w0.5: J3.6 U2.10
"OUTL 28": J3.5 Q15.4 R30.1 U2.11 | length 10
  Bottom Layer w0.3: Q15.4 137.11,87.69 136.209,88.591 R30.1 137.46,90.176 J3.5
  Bottom Layer w0.5: J3.5 U2.11
"OUTL 29": J3.4 Q18.2 R33.1 U2.12 | length 10.1
  Bottom Layer w0.3: Q18.2 139.77,87.83 139.009,88.591 R33.1 138.475,89.375 J3.4
  Bottom Layer w0.5: J3.4 U2.12
"OUTL 30": J3.3 Q18.4 R36.1 U2.13 | length 10.1
  Bottom Layer w0.3: Q18.4 142.31,87.89 141.609,88.591 R36.1 141.075,89.435 J3.3
  Bottom Layer w0.5: J3.3 U2.13
"OUTL 31": J3.2 Q22.2 R40.1 U2.14 | length 10.1
  Bottom Layer w0.3: Q22.2 144.97,87.83 144.209,88.591 R40.1 143.675,89.495 J3.2
  Bottom Layer w0.5: J3.2 U2.14
"OUTL 32": J3.1 Q22.4 R44.1 U2.15 | length 18.7
  Bottom Layer w0.3: Q22.4 147.51,87.89 146.809,88.591 R44.1 147.62,89.936 J3.1
  Bottom Layer w0.5: U2.15 147.62,98.52 J3.1
"OUTP 1": J5.32 J6.32 J7.32 Q1.7 Q1.8 | length 13.5
  Bottom Layer w0.5: Q1.8 Q1.7 59.07,77.23 62.08,74.22 J7.32
  Bottom Layer w1.5: J5.32 J6.32 J7.32
"OUTP 2": J5.31 J6.31 J7.31 Q1.5 Q1.6 | length 14.1
  Bottom Layer w0.5: Q1.5 Q1.6 60.34,77.56 62.4,75.5 62.88,75.5 J7.31
  Bottom Layer w1.5: J5.31 J6.31 J7.31
"OUTP 3": J5.30 J6.30 J7.30 Q5.7 Q5.8 Q9.2 | length 14.5
  Bottom Layer w1: Q9.2 64.16,80.14 Q5.8 66,79.5 66,75.7 67.16,74.54 J7.30
  Bottom Layer w1.5: J5.30 J6.30 J7.30
"OUTP 4": J5.29 J6.29 J7.29 Q4.2 Q5.5 Q5.6 | length 14.2
  Bottom Layer w1: J7.29 69.7,74.4 67.8,76.3 67.8,79.64 Q4.2@70.3,79.64
  Bottom Layer w1.5: J5.29 J6.29 J7.29
"OUTP 5": J5.28 J6.28 J7.28 Q8.7 Q8.8 | length 12.8
  Bottom Layer w0.5: Q8.8 Q8.7 73.47,77.57 72.24,76.34 J7.28
  Bottom Layer w1.5: J5.28 J6.28 J7.28
"OUTP 6": J5.27 J6.27 J7.27 Q8.5 Q8.6 | length 12.1
  Bottom Layer w0.5: J5.27@74.74,68.72 J5.27 ; J7.27@74.74,73.8 Q8.6 Q8.5
  Bottom Layer w1.5: J5.27 J6.27 J7.27
"OUTP 7": J5.26 J6.26 J7.26 Q7.2 Q20.7 Q20.8 | length 15.3
  Bottom Layer w1: J7.26 80.4,76.84 80.4,79.5 Q20.8 78.56,80.14 Q7.2
  Bottom Layer w1.5: J5.26 J6.26 J7.26
"OUTP 8": J5.25 J6.25 J7.25 Q3.2 Q20.5 Q20.6 | length 14.4
  Bottom Layer w1: J7.25 79.86,74.06 82.2,76.4 82.2,79.64 Q3.2@84.7,79.64
  Bottom Layer w1.5: J5.25 J6.25 J7.25
"OUTP 9": J5.24 J6.24 J7.24 Q11.7 Q11.8 | length 15.3
  Bottom Layer w0.5: J7.24 84.34,75.7 85.678,75.7 87.77,77.792 Q11.7 Q11.8
  Bottom Layer w1.5: J5.24 J6.24 J7.24
"OUTP 10": J5.23 J6.23 J7.23 Q11.5 Q11.6 | length 13.8
  Bottom Layer w0.5: J7.23 89.04,77.86 Q11.6 Q11.5
  Bottom Layer w1.5: J5.23 J6.23 J7.23
"OUTP 11": J5.22 J6.22 J7.22 Q14.7 Q14.8 | length 14
  Bottom Layer w0.5: J7.22 87.48,74.58 91.5,78.6 Q14.8 Q14.7
  Bottom Layer w1.5: J5.22 J6.22 J7.22
"OUTP 12": J5.21 J6.21 J7.21 Q14.5 Q14.6 | length 13.8
  Bottom Layer w0.5: J7.21 90.02,74.42 94.24,78.64 Q14.6 Q14.5
  Bottom Layer w1.5: J5.21 J6.21 J7.21
"OUTP 13": J5.20 J6.20 J7.20 Q17.7 Q17.8 | length 14
  Bottom Layer w0.5: J7.20 92.56,74.66 96.7,78.8 Q17.8 Q17.7
  Bottom Layer w1.5: J5.20 J6.20 J7.20
"OUTP 14": J5.19 J6.19 J7.19 Q17.5 Q17.6 | length 13.9
  Bottom Layer w0.5: J7.19 95.1,74.2 99.44,78.54 Q17.6 Q17.5
  Bottom Layer w1.5: J5.19 J6.19 J7.19
"OUTP 15": J5.18 J6.18 J7.18 Q21.7 Q21.8 | length 14.1
  Bottom Layer w0.5: J7.18 97.64,74.34 101.9,78.6 Q21.8 Q21.7
  Bottom Layer w1.5: J5.18 J6.18 J7.18
"OUTP 16": J5.17 J6.17 J7.17 Q21.5 Q21.6 | length 13.9
  Bottom Layer w0.5: J7.17 100.18,74.08 104.64,78.54 Q21.6 Q21.5
  Bottom Layer w1.5: J5.17 J6.17 J7.17
"OUTP 17": J5.16 J6.16 J7.16 Q13.7 Q13.8 | length 14.1
  Bottom Layer w0.5: J7.16 102.72,74.12 107.1,78.5 Q13.8 Q13.7
  Bottom Layer w1.5: J5.16 J6.16 J7.16
"OUTP 18": J5.15 J6.15 J7.15 Q13.5 Q13.6 | length 14
  Bottom Layer w0.5: J7.15 105.26,73.96 109.84,78.54 Q13.6 Q13.5
  Bottom Layer w1.5: J5.15 J6.15 J7.15
"OUTP 19": J5.14 J6.14 J7.14 Q16.7 Q16.8 | length 14.2
  Bottom Layer w0.5: J7.14 107.8,74 112.3,78.5 Q16.8 Q16.7
  Bottom Layer w1.5: J5.14 J6.14 J7.14
"OUTP 20": J5.13 J6.13 J7.13 Q16.5 Q16.6 | length 14
  Bottom Layer w0.5: J7.13 110.34,73.84 115.04,78.54 Q16.6 Q16.5
  Bottom Layer w1.5: J5.13 J6.13 J7.13
"OUTP 21": J5.12 J6.12 J7.12 Q19.7 Q19.8 | length 14.2
  Bottom Layer w0.5: J7.12 112.88,73.88 117.5,78.5 Q19.8 Q19.7
  Bottom Layer w1.5: J5.12 J6.12 J7.12
"OUTP 22": J5.11 J6.11 J7.11 Q19.5 Q19.6 | length 14.1
  Bottom Layer w0.5: J7.11 120.24,78.58 Q19.6 Q19.5
  Bottom Layer w1.5: J5.11 J6.11 J7.11
"OUTP 23": J5.10 J6.10 J7.10 Q23.7 Q23.8 | length 14.3
  Bottom Layer w0.5: J7.10 117.96,74.06 122.7,78.8 Q23.8 Q23.7
  Bottom Layer w1.5: J5.10 J6.10 J7.10
"OUTP 24": J5.9 J6.9 J7.9 Q23.5 Q23.6 | length 14.1
  Bottom Layer w0.5: J7.9 120.5,74 125.44,78.94 Q23.6 Q23.5
  Bottom Layer w1.5: J5.9 J6.9 J7.9
"OUTP 25": J5.8 J6.8 J7.8 Q12.7 Q12.8 | length 14.3
  Bottom Layer w0.5: J7.8 123.04,74.04 127.9,78.9 Q12.8 Q12.7
  Bottom Layer w1.5: J5.8 J6.8 J7.8
"OUTP 26": J5.7 J6.7 J7.7 Q12.5 Q12.6 | length 14.2
  Bottom Layer w0.5: J7.7 130.64,78.82 Q12.6 Q12.5
  Bottom Layer w1.5: J5.7 J6.7 J7.7
"OUTP 27": J5.6 J6.6 J7.6 Q15.7 Q15.8 | length 14.4
  Bottom Layer w0.5: J7.6 133.1,78.74 Q15.8 Q15.7
  Bottom Layer w1.5: J5.6 J6.6 J7.6
"OUTP 28": J5.5 J6.5 J7.5 Q15.5 Q15.6 | length 14.2
  Bottom Layer w0.5: J7.5 135.84,78.94 Q15.6 Q15.5
  Bottom Layer w1.5: J5.5 J6.5 J7.5
"OUTP 29": J5.4 J6.4 J7.4 Q18.7 Q18.8 | length 14.4
  Bottom Layer w0.5: J7.4 138.3,78.86 Q18.8 Q18.7
  Bottom Layer w1.5: J5.4 J6.4 J7.4
"OUTP 30": J5.3 J6.3 J7.3 Q18.5 Q18.6 | length 14.4
  Bottom Layer w0.5: J7.3 135.96,73.76 141.04,78.84 Q18.6 Q18.5
  Bottom Layer w1.5: J5.3 J6.3 J7.3
"OUTP 31": J5.2 J6.2 J7.2 Q22.7 Q22.8 | length 15.1
  Bottom Layer w0.5: J7.2 138.28,74.28 139.7,75.7 140.8,75.7 143.5,78.4 Q22.8 Q22.7
  Bottom Layer w1.5: J5.2 J6.2 J7.2
"OUTP 32": J5.1 J6.1 J7.1 Q22.5 Q22.6 | length 14.5
  Bottom Layer w0.5: J7.1 141.06,73.76 146.24,78.94 Q22.6 Q22.5
  Bottom Layer w1.5: J5.1 J6.1 J7.1
SCLK: J1.3 U1.25 U2.25 | length 48.3
  Bottom Layer w0.3: U1.25 80.58,102.6 81.9,102.6 82.6,103.3 84.5,103.3 87,105.8 105.5,105.8 ; J1.3 105.44,105.86 105.5,105.8 ; U2.25 119.68,102.12 116,105.8 105.5,105.8
  Bottom Layer w0.5: U2.25@119.66,101.06 119.66,101.04 U2.25@119.8,100.9
SIN: J1.1 U1.26 | length 29.9
  Bottom Layer w0.3: U1.26 76.96,101.06 78.5,102.6 79.6,102.6 80.2,103.2 81.5,103.2 82.3,104 84.2,104 86.7,106.5 101.2,106.5 102.9,108.2 J1.1
SOUT: U2.17
TLCTOTLC: U1.17 U2.26 | length 21.2
  Bottom Layer w0.3: U1.17 99.36,101.76 102,104.4 114.3,104.4 117.14,101.56 U2.26
XLAT: J1.5 U1.24 U2.24 | length 64.7
  Bottom Layer w0.3: U1.24 83.12,102.6 84.8,102.6 87.3,105.1 115.4,105.1 118.4,102.1 118.4,100 119,99.4 120.56,99.4 U2.24 121.84,101.06 116.4,106.5 108.9,106.5 107.98,107.42 J1.5
pads on no net: U1.16 U2.16
copper on no net:
  other v5: 67,108.3

## Polygon pours and split planes (outlines as drawn)
GND on Bottom Layer "Top Layer-No Net" (solid, pour order 4): 150,115 150,65 50,65 50,115

## Other copper
Bottom Layer:
  text "DBL TCL5940 Led Driver" at 96.4,111.2 h1.2
  text "v 1.0" at 136.3,109.7 h2

## Silkscreen, mask and mechanical layers (free items; w line width, h text height)
Top Overlay:
  lines w0.4: 50,115 150,115 150,65

## Text inside footprints (layer, text, board x,y; h text height)
J1: Top Overlay "10" at 119.2,110.2 h1.52; Top Overlay "9" at 119.5,107.8 h1.52; Top Overlay "2" at 95.9,110.4 h1.52; Top Overlay "1" at 96.3,107.9 h1.52
J3: Top Overlay "32" at 65.7,88.1 h1; Top Overlay "1" at 148.8,92.7 h1
J4: Top Overlay "32" at 57.8,65.9 h1.52; Top Overlay "1" at 142.9,65.2 h1.52